# Altium PCB SH-C31G-V1.0.PcbDoc
Units mil, origin at the board's own origin, x right, y up, seen from the top; angles counter-clockwise.
Board outline 2106.3 x 1417.32 mil, 2 copper layers (Top Layer, Bottom Layer), stack 62.206 mil thick; 45 components, 30 nets, 166 pads, 49 vias.
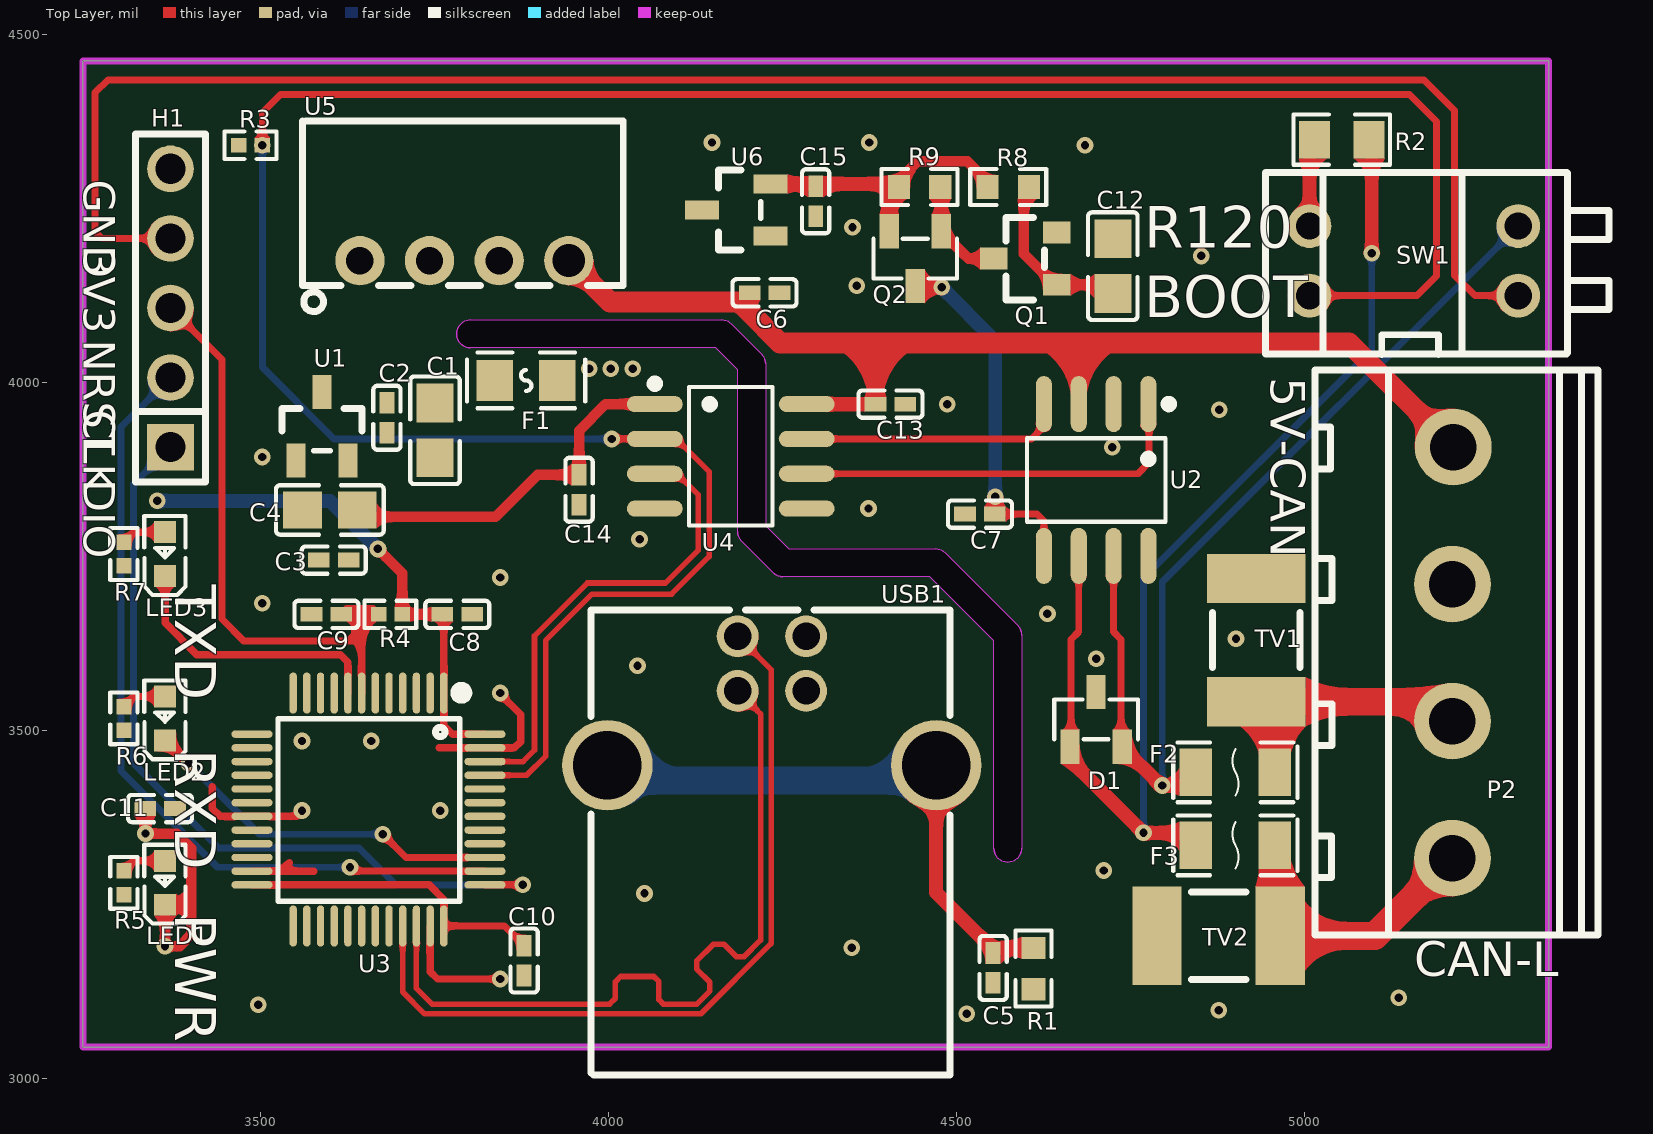
[diagram p0: Top Layer view]
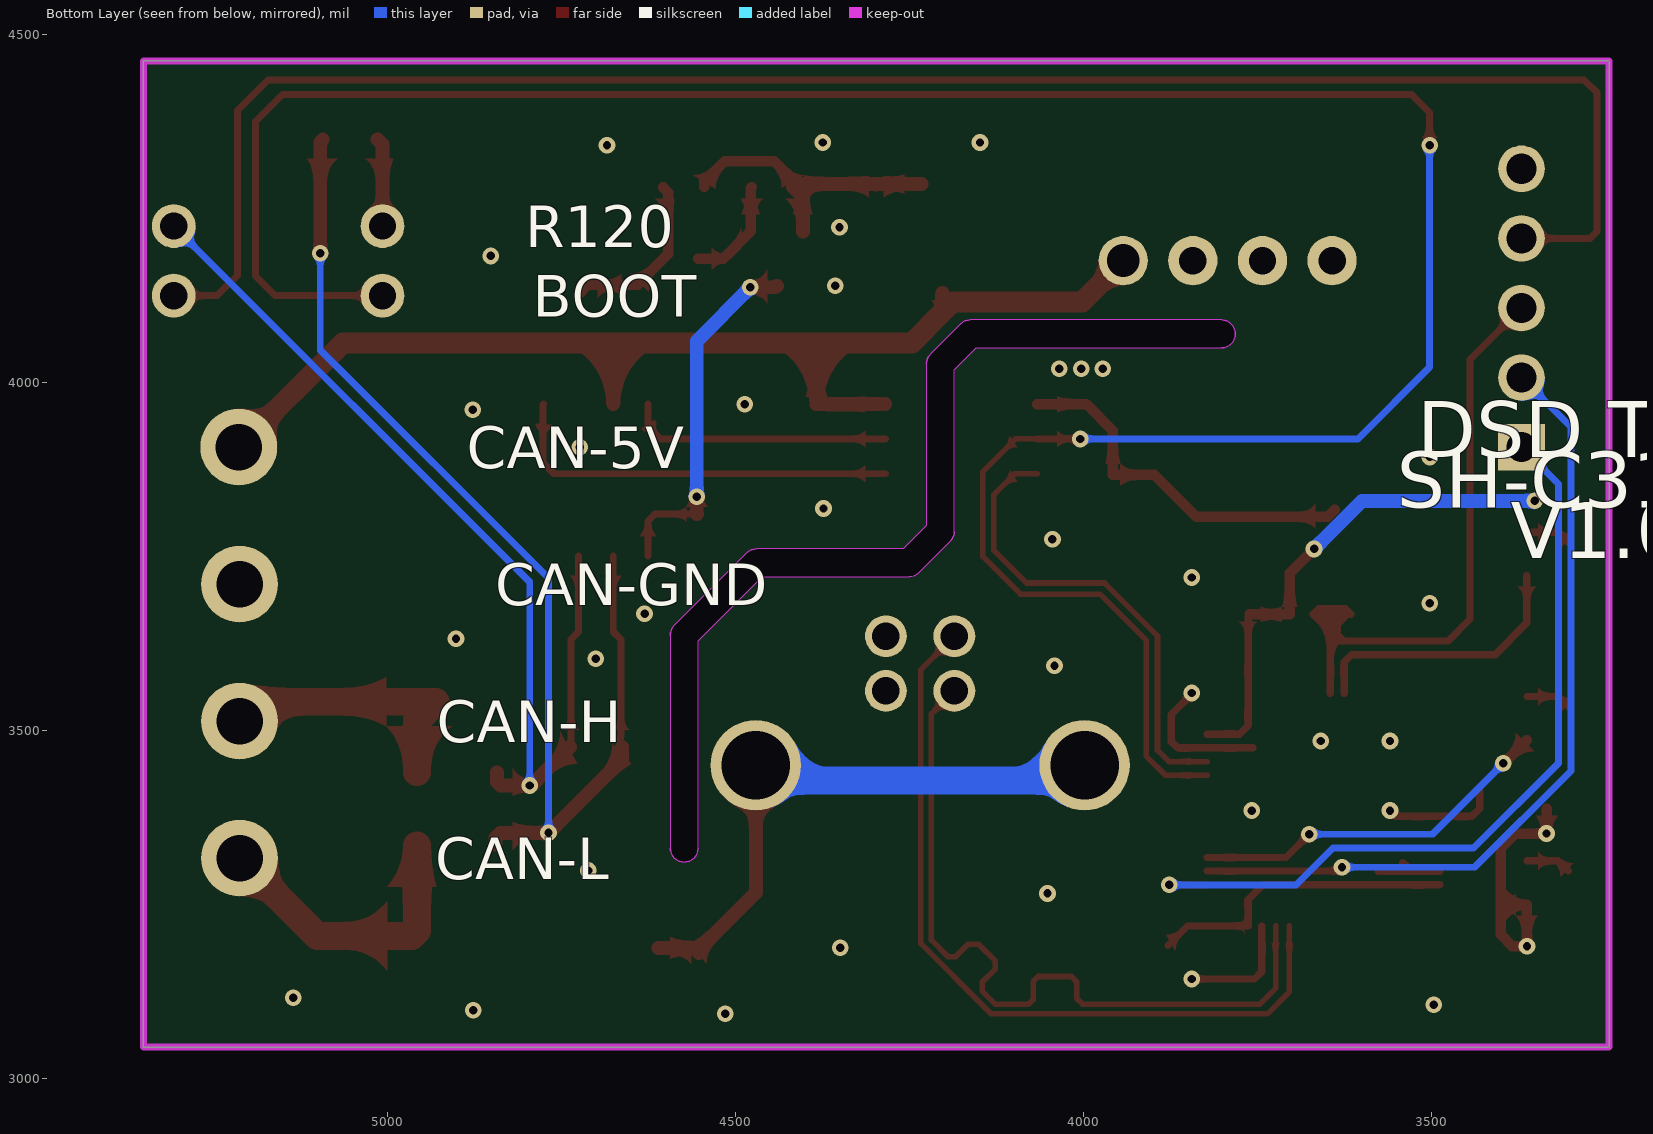
[diagram p1: Bottom Layer view, seen from below]

## Layer stack, top to bottom
Top Solder Mask Layer: solder mask 0.394, Dk 3.3
Top Layer: signal copper 1.379
Dielectric1: surface 59.449, FR4, Dk 4.5
Bottom Layer: signal copper 1.378
Bottom Solder Mask Layer: solder mask 0.394, Dk 3.3

## Board outline
3244.5,3044.65 3244.5,4461.97 5350.79,4461.97 5350.79,3044.65
cut-out: 4573.5,3310.65 4569.59,3311.03 4565.84,3312.17 4562.38,3314.02 4559.35,3316.51 4556.87,3319.54 4555.02,3322.99 4553.88,3326.75 4553.5,3330.65 4553.5,3628.36 4461.21,3720.65 4250.5,3720.65 4246.59,3721.03 4242.84,3722.17 4239.38,3724.02 4236.35,3726.51 4191.35,3771.51 4188.87,3774.54 4187.02,3777.99 4185.88,3781.75 4185.5,3785.65 4185.5,4018.36 4154.21,4049.65 3801.5,4049.65 3797.59,4050.03 3793.84,4051.17 3790.38,4053.02 3787.35,4055.51 3784.87,4058.54 3783.02,4061.99 3781.88,4065.75 3781.5,4069.65 3781.88,4073.55 3783.02,4077.3 3784.87,4080.76 3787.35,4083.79 3790.38,4086.28 3793.84,4088.12 3797.59,4089.26 3801.5,4089.65 4162.5,4089.65 4166.4,4089.26 4170.15,4088.12 4173.61,4086.28 4176.64,4083.79 4219.64,4040.79 4222.13,4037.76 4223.97,4034.3 4225.11,4030.55 4225.5,4026.65 4225.5,3793.93 4258.78,3760.65 4469.5,3760.65 4473.4,3760.26 4477.15,3759.12 4480.61,3757.28 4483.64,3754.79 4587.64,3650.79 4590.13,3647.76 4591.97,3644.3 4593.11,3640.55 4593.5,3636.65 4593.5,3330.65 4593.11,3326.75 4591.97,3322.99 4590.13,3319.54 4587.64,3316.51 4584.61,3314.02 4581.15,3312.17 4577.4,3311.03

## Design rules (kind name [scope] priority, off if disabled: settings)
BoardOutlineClearance Default [All] p0: genericclearance=10 ignorepadtopadclearanceinfootprint=FALSE except(0: Arc-SplitContinuation Track-SplitContinuation SMDPad-SplitContinuation THPad-SplitContinuation Via-SplitContinuation Fill-SplitContinuation Poly-SplitContinuation Region-SplitContinuation Text-SplitContinuation)
BoardOutlineClearance Plane_Default [All] p0: genericclearance=10 ignorepadtopadclearanceinfootprint=FALSE except(0: Arc-SplitContinuation Track-SplitContinuation SMDPad-SplitContinuation THPad-SplitContinuation Via-SplitContinuation Fill-SplitContinuation Poly-SplitContinuation Region-SplitContinuation Text-SplitContinuation)
BoardOutlineClearance Copper_gge5476 [All] p0: genericclearance=10 ignorepadtopadclearanceinfootprint=FALSE except(0: Arc-SplitContinuation Track-SplitContinuation SMDPad-SplitContinuation THPad-SplitContinuation Via-SplitContinuation Fill-SplitContinuation Poly-SplitContinuation Region-SplitContinuation Text-SplitContinuation)
BoardOutlineClearance Copper_gge6378 [All] p0: genericclearance=10 ignorepadtopadclearanceinfootprint=FALSE except(0: Arc-SplitContinuation Track-SplitContinuation SMDPad-SplitContinuation THPad-SplitContinuation Via-SplitContinuation Fill-SplitContinuation Poly-SplitContinuation Region-SplitContinuation Text-SplitContinuation)
BoardOutlineClearance Copper_gge5478 [All] p0: genericclearance=10 ignorepadtopadclearanceinfootprint=FALSE except(0: Arc-SplitContinuation Track-SplitContinuation SMDPad-SplitContinuation THPad-SplitContinuation Via-SplitContinuation Fill-SplitContinuation Poly-SplitContinuation Region-SplitContinuation Text-SplitContinuation)
BoardOutlineClearance Copper_gge6371 [All] p0: genericclearance=10 ignorepadtopadclearanceinfootprint=FALSE except(0: Arc-SplitContinuation Track-SplitContinuation SMDPad-SplitContinuation THPad-SplitContinuation Via-SplitContinuation Fill-SplitContinuation Poly-SplitContinuation Region-SplitContinuation Text-SplitContinuation)
BoardOutlineClearance otherClearance [All] p0: genericclearance=10 ignorepadtopadclearanceinfootprint=FALSE except(0: Arc-SplitContinuation Track-SplitContinuation SMDPad-SplitContinuation THPad-SplitContinuation Via-SplitContinuation Fill-SplitContinuation Poly-SplitContinuation Region-SplitContinuation Text-SplitContinuation)
Clearance Default [All] p1: gap=7 ignorepadtopadclearanceinfootprint=FALSE
Clearance Plane_Default [All] p1: gap=7 ignorepadtopadclearanceinfootprint=FALSE
Clearance Copper_gge5476 [All] p1: gap=7 ignorepadtopadclearanceinfootprint=FALSE
Clearance Copper_gge6378 [All] p1: gap=7 ignorepadtopadclearanceinfootprint=FALSE
Clearance Copper_gge5478 [All] p1: gap=7 ignorepadtopadclearanceinfootprint=FALSE
Clearance Copper_gge6371 [All] p1: gap=7 ignorepadtopadclearanceinfootprint=FALSE
Clearance otherClearance [All] p1: gap=7 ignorepadtopadclearanceinfootprint=FALSE
DiffPairsRouting differentialPair [All] p1: maxuncoupledlength=10 minlimit=5.9843 maxlimit=Infinity mostfreqgap=5.9843 toplayer_minwidth=5 toplayer_prefwidth=10 toplayer_maxwidth=100 bottomlayer_minwidth=5 bottomlayer_prefwidth=10 bottomlayer_maxwidth=100
PasteMaskExpansion pasteMaskExpansion [All] p1: expansion=0
PlaneConnect Default [All] p1: planeconnectstyle=Relief reliefexpansion=20 reliefentries=4 reliefconductorwidth=0 reliefairgap=10
PolygonConnect gge5476 [All] p1: connectstyle=Direct reliefentries=4 reliefconductorwidth=10 polygonreliefangle="90 Angle" airgapwidth=10
PolygonConnect gge6378 [All] p1: connectstyle=Direct reliefentries=4 reliefconductorwidth=10 polygonreliefangle="90 Angle" airgapwidth=10
PolygonConnect gge5478 [All] p1: connectstyle=Relief reliefentries=4 reliefconductorwidth=0 polygonreliefangle="90 Angle" airgapwidth=10
PolygonConnect gge6371 [All] p1: connectstyle=Direct reliefentries=4 reliefconductorwidth=10 polygonreliefangle="90 Angle" airgapwidth=10
RoutingVias Default [All] p1: viastyle="Through Hole" holewidth=12.0078 minholewidth=12.0078 maxholewidth=2362.0078 width=12.0078 minwidth=12.0078 maxwidth=2362.0078
SolderMaskExpansion solderMaskExpansion [IsVia] p1: useseparateexpansions=TRUE expansion=-1000 expansionbottom=-1000
SolderMaskExpansion solderMaskExpansion [All] p2: useseparateexpansions=TRUE expansion=4.0158 expansionbottom=4.0158
Width Default [All] p1: maxlimit=1000 minlimit=8 preferedwidth=10

## Components (designator, comment, footprint, x,y, rotation, side; value= is the part's Value field where it differs from the comment)
C1 "10uF" C0805_1 3750.5,3931.02 r90 top locked
C2 "100nF" C0402_2 3681.5,3949.11 r90 top locked
C3 "100nF" C0402_2 3604.96,3744.65 r0 top locked
C4 "10uF" C0805_1 3599.5,3816.65 r0 top locked
C5 "100nF" C0402_2 4552.5,3158.65 r90 top
C6 "100nF" C0402_2 4224.04,4128.65 r180 top
C7 "NC" C0402_2 4533.5,3810.65 r0 top
C8 "100nF" C0402_2 3782.5,3666.65 r180 top locked
C9 "100nF" C0402_2 3594.5,3666.65 r0 top locked
C10 "100nF" C0402_2 3878.5,3169.19 r90 top
C11 "100nF" C0402_2 3355.5,3387.65 r0 top
C12 "10uF" C0805_1 4724.5,4167.02 r270 top locked
C13 "" C0402 4404.96,3968.65 r180 top locked
C14 "" C0402 3957.5,3845.65 r90 top
C15 "100nF" C0402_2 4297.5,4260.11 r90 top locked
D1 "" SOT-23-3_L2.9-W1.3-P1.90-LS2.4-BR 4700.5,3515.65 r270 top locked
F1 "" F0805 3881.5,4002.65 r180 top locked
F2 "SMD1206B020TF/24" F1206_1 4900.5,3439.65 r0 top locked
F3 "SMD1206B020TF/24" F1206_1 4900.5,3334.65 r0 top locked
H1 "" HDR-TH_5P-P2.54-V-M 3370.48,4106.85 r90 top locked
LED1 "" LED0603-RD_RED_1 3362.61,3280.87 r90 top locked
LED2 "" LED0603-RD 3362.61,3517.09 r90 top locked
LED3 "" LED0603-RD 3362.61,3753.31 r90 top locked
P2 "WJ128V-5.0-4P" CONN-TH_4P-P5.00_WJ128V-4P-5.0-14-00A 5213,3611.58 r90 top locked
Q1 "S8050" SOT-23_L2.9-W1.3-P1.90-LS2.4-BR 4598.77,4177.65 r0 top locked
Q2 "SI2301" SOT-23-3_L2.9-W1.3-P1.90-LS2.4-BR_2 4440.5,4177.65 r90 top locked
R1 "" R0603 4610.5,3157.65 r90 top
R2 "" R0805 5053.5,4348.65 r180 top locked
R3 "" R0402 3485.46,4340.65 r0 top
R4 "" R0402 3686.5,3666.65 r0 top locked
R5 "" R0402 3303.55,3280.87 r90 top locked
R6 "" R0402 3303.55,3517.09 r90 top locked
R7 "" R0402 3303.55,3753.31 r90 top locked
R8 "" R0603 4574.16,4280.65 r180 top locked
R9 "100kΩ" R0603 4446.84,4280.65 r180 top locked
SW1 "DP-02RP" SW-TH_DP-02XP 5157.05,4174.57 r90 top locked
TV1 "" DIO-DT-SMD_L4.5-W3.2 4930.5,3629.65 r90 top locked
TV2 "" DIO-DT-SMD_L4.5-W3.2 4876.5,3204.65 r180 top locked
U1 "ME6209A33M3G" SOT-23(SOT-23-3) 3588.1,3936.85 r0 top locked
U2 "TJA1051T/3,118" SOIC-8_L4.9-W3.9-P1.27-LS6.0-BL 4700.5,3859.65 r180 top locked
U3 "STM32G431C8T6TR" LQFP-48_L7.0-W7.0-P0.50-LS9.0-BL_1 3654.95,3386.2 r180 top locked
U4 "ADUM3201ARZ" SOIC-8_L4.9-W3.9-P1.27-LS6.0-BL 4175.5,3893.65 r270 top locked
U5 "B0505S-1WR3" PWRM-TH_B0503S-1WR2 3792.68,4174.84 r0 top locked
U6 "ME6209A33M3G" SOT-23(SOT-23-3) 4183.5,4247.65 r90 top locked
USB1 "" USB-B-TH_USB-B01 4234.5,3542.6 r180 top locked

## Footprints (in the part's own frame and the unit in brackets; to place one, negate y for a bottom-side part, rotate by r counter-clockwise, add the part's x,y. Pads: shape width x height; smd on the part's side, far side on the other; paste and mask are expansions set on the pad)
C0402 [mm]
  rect 0.79x0.54 smd paste-100 mask+0.051: 1(-0.545,0) 2(0.545,0)
  silkscreen extent -1.17,-0.5 1.17,0.5
C0402_2 [mm]
  rect 0.79x0.54 smd paste-100 mask+0.051: 1(-0.545,0) 2(0.545,0)
  silkscreen extent -1.17,-0.5 1.17,0.5
C0805_1 [mm]
  rect 1.41x1.35 smd paste-100 mask+0.051: 1(-1,0) 2(1,0)
  silkscreen extent -1.96,-0.9 1.96,0.9
CONN-TH_4P-P5.00_WJ128V-4P-5.0-14-00A [mm]
  round 2.8 hole 1.7 paste+0 mask+0.051: 1(-7.5,0.015) 2(-2.5,0.015) 3(2.5,0.015) 4(7.5,-0.015)
  silkscreen extent -10.31,-5.29 10.31,5.02
DIO-DT-SMD_L4.5-W3.2 [mm]
  rect 1.8x3.6 smd paste+0 mask+0.051: 1(-2.25,0) 2(2.25,0)
  silkscreen extent -1,-1.6 1,1.6
F0805 [mm]
  rect 1.335x1.5 smd paste-100 mask+0.051: 1(-1.142,0) 2(1.142,0)
  silkscreen extent -2.16,-1.02 2.16,1.02
F1206_1 [mm]
  rect 1.19x1.728 smd paste+0 mask+0.051: 1(-1.445,0) 2(1.445,0)
  silkscreen extent -2.27,-1.09 2.27,1.09
HDR-TH_5P-P2.54-V-M [mm]
  rect 1.7x1.7 hole 1.1 paste+0 mask+0.051: 1(-5.08,0)
  round 1.7 hole 1.1 paste+0 mask+0.051: 2(-2.54,0) 3(0,0) 4(2.54,0) 5(5.08,0)
  silkscreen extent -6.35,-1.27 6.35,1.27
LED0603-RD [mm]
  rect 0.8x0.8 smd paste+0 mask+0.051: 1(-0.799,-0.003) 2(0.799,0.003)
  silkscreen extent -1.49,-0.75 1.39,0.76
LED0603-RD_RED_1 [mm]
  rect 0.8x0.8 smd paste+0 mask+0.051: 1(-0.8,-0.003) 2(0.8,0.003)
  silkscreen extent -1.49,-0.75 1.39,0.76
LQFP-48_L7.0-W7.0-P0.50-LS9.0-BL_1 [mm]
  oval 0.27x1.5 smd paste+0 mask+0.05: 1(-2.75,-4.25) 2(-2.25,-4.25) 3(-1.75,-4.25) 4(-1.25,-4.25) 5(-0.75,-4.25) 6(-0.25,-4.25) 7(0.25,-4.25) 8(0.75,-4.25) 9(1.25,-4.25) 10(1.75,-4.25) 11(2.25,-4.25) 12(2.75,-4.25) 25(2.75,4.25) 26(2.25,4.25) 27(1.75,4.25) 28(1.25,4.25) 29(0.75,4.25) 30(0.25,4.25) 31(-0.25,4.25) 32(-0.75,4.25) 33(-1.25,4.25) 34(-1.75,4.25) 35(-2.25,4.25) 36(-2.75,4.25)
  oval 1.5x0.27 smd paste+0 mask+0.05: 13(4.25,-2.75) 14(4.25,-2.25) 15(4.25,-1.75) 16(4.25,-1.25) 17(4.25,-0.75) 18(4.25,-0.25) 19(4.25,0.25) 20(4.25,0.75) 21(4.25,1.25) 22(4.25,1.75) 23(4.25,2.25) 24(4.25,2.75) 37(-4.25,2.75) 38(-4.25,2.25) 39(-4.25,1.75) 40(-4.25,1.25) 41(-4.25,0.75) 42(-4.25,0.25) 43(-4.25,-0.25) 44(-4.25,-0.75) 45(-4.25,-1.25) 46(-4.25,-1.75) 47(-4.25,-2.25) 48(-4.25,-2.75)
  silkscreen extent -3.59,-4.46 3.3,3.34
PWRM-TH_B0503S-1WR2 [mm]
  round 1.8 hole 1 paste+0 mask+0.051: 1(-3.81,0) 2(-1.27,0) 3(1.27,0)
  round 1.8 hole 1.2 paste+0 mask+0.051: 4(3.81,0)
  silkscreen extent -5.9,-1.86 5.8,5.1
R0402 [mm]
  rect 0.566x0.54 smd paste-100 mask+0.051: 1(-0.433,0) 2(0.433,0)
  silkscreen extent -0.94,-0.5 0.94,0.5
R0603 [mil]
  rect 31.75x34.02 smd paste-3937.01 mask+2: 1(-29.66,0) 2(29.66,0)
  silkscreen extent -55,-26 55,26
R0805 [mm]
  rect 1.133x1.377 smd paste-100 mask+0.051: 1(-1,0) 2(1,0)
  silkscreen extent -1.76,-0.92 1.76,0.92
SOIC-8_L4.9-W3.9-P1.27-LS6.0-BL [mm]
  oval 0.588x2.045 smd paste+0 mask+0.051: 1(-1.905,-2.772) 2(-0.635,-2.772) 3(0.635,-2.772) 4(1.905,-2.772) 5(1.905,2.772) 6(0.635,2.772) 7(-0.635,2.772) 8(-1.905,2.772)
  silkscreen extent -2.8,-2.92 2.53,1.52
SOT-23(SOT-23-3) [mm]
  rect 0.7x1.25 smd paste+0 mask+0.102: 1(-0.95,-1.25) 2(0.95,-1.25) 3(0,1.25)
  silkscreen extent -1.46,-0.9 1.46,0.65
SOT-23-3_L2.9-W1.3-P1.90-LS2.4-BR [mm]
  rect 1.25x0.7 smd paste+0 mask+0.051: 1(1,-0.95) 2(1,0.95) 3(-1,0)
  silkscreen extent -0.73,-1.53 0.73,1.53
SOT-23-3_L2.9-W1.3-P1.90-LS2.4-BR_2 [mm]
  rect 1.25x0.7 smd paste+0 mask+0.051: 1(1,-0.95) 2(1,0.95) 3(-1,0)
  silkscreen extent -0.73,-1.53 0.73,1.53
SOT-23_L2.9-W1.3-P1.90-LS2.4-BR [mm]
  rect 1x0.8 smd paste+0 mask+0.051: 1(1.15,-0.95) 2(1.15,0.95) 3(-1.15,0)
  silkscreen extent -0.7,-1.5 0.7,1.5
SW-TH_DP-02XP [mm]
  round 1.6 hole 1 paste+0 mask+0.051: 1(-1.27,-3.81) 2(1.27,-3.81) 3(1.27,3.81) 4(-1.27,3.81)
  silkscreen extent -3.42,-7.13 3.22,5.42
USB-B-TH_USB-B01 [mil]
  round 60 hole 39.4 paste+0 mask+2: 1(-49.2,-92.7) 2(49.2,-92.7) 3(49.2,-14) 4(-49.2,-14)
  round 129.9 hole 98.4 paste+0 mask+2: 5(-236.2,92.7) 6(236.2,92.7)
  silkscreen extent -256,-130 260,538

## Via types
v1: diameter 24, hole 12, Top Layer to Bottom Layer, 49 vias

## Nets (pads, with @x,y where several pads share a name; then routed paths per layer and width w, separated by ;. In a path a pad name is that pad's centre, name@x,y a point inside that pad or via, vN(x,y) a via of type N, cw(c..) or ccw(c..) an arc to the next point about the centre after c; other vN are vias at no path point)
$C5_2: C5.2 R1.2 USB1.5 USB1.6 | length 865
  Top Layer w20: USB1.5 4470.7,3266.83 C5.2@4550.22,3187.31 ; R1.2 C5.2@4559.7,3187.31 ; C5.2@4550.22,3187.31 C5.2@4559.7,3187.31 ; C5.2@4550.22,3187.31 4552.5,3185.03 C5.2 C5.2@4559.7,3187.31
  Bottom Layer w40: USB1.6 4020.55,3427.65 4448.44,3427.65 USB1.5
$C12_2: C12.2 Q1.1 R8.1 | length 247.2
  Top Layer w15: R8.1 4603.82,4279.65 4596.5,4272.33 4596.5,4184.86 4640.11,4141.24 Q1.1@4640.11,4140.24 ; Q1.1 4711.9,4140.24 C12.2
$C15_2: C15.2 Q2.2 R8.2 R9.2 U6.2 | length 444.6
  Top Layer w15: C15.2 C15.2@4297.5,4285.04 ; R9.2 4417.18,4290.33 4444.5,4317.65 4515.5,4317.65 4544.5,4288.65 R8.2
  Top Layer w20: U6.2 4297.5,4285.04 4412.78,4285.04 R9.2 R9.2@4403.1,4266.57 ; 4393.5,4279.65 4403.1,4270.05 R9.2@4403.1,4266.57 ; Q2.2 R9.2@4403.1,4266.57
$F2_2: F2.2 P2.2 TV1.1 | length 406
  Top Layer w40: F2.2 4957.39,3514.18 TV1.1 5184.49,3541.07 P2.2
$F3_2: F3.2 P2.1 TV2.1 | length 426.8
  Top Layer w40: F3.2 4957.39,3212.34 TV2.1 5100.76,3204.65 P2.1
$LED1_2: LED1.2 R5.2 | length 64.9
  Top Layer w10.6: R5.2 3317.99,3312.34 LED1.2
$LED2_2: LED2.2 R6.2 | length 64.9
  Top Layer w10.6: R6.2 3317.99,3548.56 LED2.2
$LED3_2: LED3.2 R7.2 | length 64.9
  Top Layer w10.6: R7.2 3317.99,3784.78 LED3.2
$Q1_3: Q1.3 Q2.1 R9.1 | length 156.1
  Top Layer w15: R9.1 4477.9,4279.25 Q2.1 4517.27,4177.65 Q1.3
$R2_2: R2.2 SW1.3 | length 144
  Top Layer w20: R2.2 5007.05,4341.58 SW1.3 SW1.3@5019.05,4236.57
+3V3: C3.2 C4.2 C8.2 C10.2 C11.2 C14.2 H1.4 R4.2 R5.1 R6.1 R7.1 SW1.1 U1.2 U3.1 U3.20 U3.21 U3.24 U3.36 U3.48 U4.1 | length 4353.2
  Top Layer w10: H1.4 3272.29,4206.85 3262.29,4216.85 3262.29,4416.44 3280.5,4434.65 5171.5,4434.65 5215.5,4390.65 5215.5,4153.65 5244.57,4124.57 SW1.1 ; U3.36 3850.26,3218.88 C10.2
  Top Layer w10.6: U3.24 3742.21,3277.93 3763.22,3256.92 U3.36 ; C8.2 3763.22,3664.46 U3.1 3763.22,3506.92 3775.67,3494.47 U3.48
  Top Layer w15: C4.2 3648.87,3806.65 3837.5,3806.65 3897.96,3867.11 C14.2 3957.5,3930.65 3995.5,3968.65 U4.1 ; v1(3668.5,3760.65) 3703.54,3725.61 R4.2 C8.2
  Bottom Layer w20: v1(3351.5,3829.65) 3599.5,3829.65 v1(3668.5,3760.65)
+3V3A: C7.2 Q2.3 U2.5 | length 521.6
  Top Layer w10: C7.2 4615.5,3810.65 4625.5,3800.65 U2.5
  Top Layer w20: Q2.3 4442.13,4136.65 v1(4478.5,4136.65) ; C7.2 4555.5,3811.19 v1(4555.5,3835.65)
  Bottom Layer w20: v1(4478.5,4136.65) 4555.5,4059.65 v1(4555.5,3835.65)
+5V: C1.2 C2.2 F1.2 U1.3 U5.2
CAN_H: D1.2 F2.1 SW1.2 U2.7 | length 1438.6
  Top Layer w10: U2.7 4725.5,3641.65 4736.5,3630.65 4736.5,3491.02 4735.9,3490.42 D1.2@4735.9,3476.28
  Top Layer w20: D1.2 4793.53,3420.65 v1(4795.5,3420.65) 4837.5,3420.65 4842.61,3425.76 F2.1@4842.61,3439.65
  Bottom Layer w10: v1(4795.5,3420.65) 4795.5,3713.01 SW1.2
CAN_L: D1.1 F3.1 R2.1 U2.6 | length 1668.6
  Top Layer w10: D1.1@4665.1,3476.28 4665.1,3490.42 4664.5,3491.02 4664.5,3630.65 4675.5,3641.65 U2.6
  Top Layer w20: D1.1 4663.1,3458.05 v1(4768.5,3352.65) 4837.5,3352.65 4844.5,3345.65 F3.1@4844.5,3335.65 ; R2.1 5096.5,4345.02 v1(5096.5,4185.65)
  Bottom Layer w10: v1(4768.5,3352.65) 4768.5,3718.65 5096.5,4046.65 v1(5096.5,4185.65)
CAN_RXD: U2.4 U4.7 | length 380.5
  Top Layer w10: U4.7 4607.5,3918.65 4625.5,3936.65 U2.4
CAN_TXD: U2.1 U4.6 | length 583
  Top Layer w10: U4.6 4760.5,3868.65 4776.5,3884.65 4776.5,3967.8 U2.1
GND: C1.1 C2.1 C3.1 C4.1 C5.1 C8.1 C9.1 C10.1 C11.1 C14.1 H1.5 LED1.1 R1.1 R3.1 U1.1 U3.19 U3.23 U3.35 U3.47 U4.4 U5.1 USB1.4 | length 1025.4
  Top Layer w10: 3823.5,3142.65 v1(3844.5,3142.65)
  Top Layer w10.6: 3430.5,3418.65 3430.5,3387.65 3441.78,3376.36 U3.19 3551.21,3376.36 v1(3559.5,3384.65) ; U3.23 3529.47,3297.62 ; 3541.5,3309.65 3529.47,3297.62 ; 3576.47,3297.62 3529.47,3297.62 ; U3.35 3743.53,3153.25 3754.13,3142.65 3823.5,3142.65 ; 3756.63,3474.78 U3.47 3864.63,3474.78 3873.5,3483.65 3873.5,3522.65 3844.5,3551.65 v1(3844.5,3553.65)
  Top Layer w15: C11.1 3334.5,3387.19 v1(3334.5,3351.65) 3379.5,3351.65 3400.5,3330.65 3400.5,3250.17 ; 3400.5,3250.17 3399.71,3249.38 LED1.1 3362.74,3189.89 v1(3362.5,3189.65) 3383.5,3189.65 3400.5,3206.65 3400.5,3250.17
  other v1: 4514.5,3092.65 3496.5,3105.65 4349.5,3187.65 4051.5,3265.65 3758.16,3384.65 3559.5,3484.65 3658.83,3484.65 4041.5,3592.65 3502.5,3682.65 3844.5,3719.65 4044.5,3774.65 3502.5,3892.65
GND-CAN: C6.1 C7.1 C12.1 C13.1 C15.1 D1.3 P2.3 Q1.2 TV1.2 TV2.2 U2.2 U2.8 U4.5 U5.3 U6.1
  other v1: 4876.5,3097.98 5135.5,3115.65 4711.5,3298.65 4700.5,3602.65 4901.5,3631.65 4630.5,3667.65 4373.5,3818.65 4723.5,3906.65 4877.5,3960.65 4486.5,3968.65 4356.5,4138.65 4851.5,4181.65 4350.5,4222.65 4684.5,4340.65 4148.5,4344.65 4374.5,4344.65
JL-SWCLK: H1.2 U3.38 | length 1177
  Top Layer w10: v1(3628.5,3303.22) 3634.1,3297.62 U3.38
  Bottom Layer w10: H1.2 3299.5,3935.87 3299.5,3441.65 3437.92,3303.22 v1(3628.5,3303.22)
JL-SWDIO: H1.1 U3.37 | length 1161.7
  Top Layer w10: U3.37 v1(3876.5,3277.95)
  Bottom Layer w10: H1.1 3317.49,3853.86 3317.49,3452.66 3439.5,3330.65 3641.5,3330.65 3694.2,3277.95 v1(3876.5,3277.95)
LED1: LED2.1 U3.39 | length 529.2
  Top Layer w10.6: v1(3675.5,3350.65) 3708.84,3317.3 U3.39
  Top Layer w15: LED2.1 3395.71,3452.65 v1(3396.5,3452.65)
  Bottom Layer w10: v1(3396.5,3452.65) 3498.5,3350.65 v1(3675.5,3350.65)
LED2: LED3.1 U3.8 | length 398
  Top Layer w10.6: LED3.1 3362.74,3654.4 3408.42,3608.72 3614.82,3608.72 3625.42,3598.12 U3.8
NRST: C9.2 H1.3 R4.1 U3.7 | length 1084.3
  Top Layer w10: H1.3 3444.5,4032.84 3444.5,3659.65 3475.5,3628.65 3626.51,3628.65 ; 3638.05,3666.65 3635.19,3663.79 3635.19,3658.35 3635.19,3654.69 3635.19,3652.72 3635.19,3637.33 ; 3645.11,3618.73 3635.19,3628.65 ; 3626.51,3628.65 3635.19,3637.33 ; 3626.51,3628.65 3635.19,3628.65 ; 3635.19,3628.65 3635.19,3637.33
  Top Layer w10.6: U3.7 3645.11,3618.73 3645.11,3642.81 ; C9.2@3621.27,3666.65 C9.2 3623.96,3674.65 3661.46,3674.65 R4.1 ; C9.2@3621.27,3666.65 C9.2@3629.57,3658.35 ; C9.2@3621.27,3666.65 3638.05,3666.65 R4.1@3668.95,3666.65 ; C9.2@3629.57,3658.35 3633.23,3654.69 ; C9.2@3629.57,3658.35 3635.19,3658.35 R4.1@3660.65,3658.35 ; 3633.23,3654.69 3635.19,3654.69 3656.99,3654.69 ; 3633.23,3654.69 3635.19,3652.72 3645.11,3642.81 ; 3645.11,3642.81 3656.99,3654.69 ; 3656.99,3654.69 R4.1@3660.65,3658.35 ; R4.1@3660.65,3658.35 R4.1@3668.95,3666.65 ; R4.1@3660.65,3658.35 3661.16,3658.35 R4.1 ; R4.1@3668.95,3666.65 R4.1
RXD: R3.2 SW1.4 U3.45 U4.2 | length 3872
  Top Layer w8: U3.45 3882.26,3435.41 3909.49,3462.64 3909.49,3629.02 3976.12,3695.66 4090.5,3695.66 4144.5,3749.65 4144.5,3871.65 4097.5,3918.65 U4.2
  Top Layer w10: v1(3502.5,4340.65) 3502.5,4387.65 3528.5,4413.65 5150.5,4413.65 5189.5,4374.65 5189.5,4152.65 5161.42,4124.57 SW1.4 ; v1(4004.5,3918.65) U4.2
  Bottom Layer w10: v1(3502.5,4340.65) 3502.5,4021.65 3605.5,3918.65 v1(4004.5,3918.65)
TXD: U3.46 U4.3 | length 682.6
  Top Layer w8: U3.46 3876.95,3455.1 3893.5,3471.65 3893.5,3635.65 3969.5,3711.65 4081.5,3711.65 4128.5,3758.65 4128.5,3838.65 4098.5,3868.65 U4.3
USBDM: U3.33 USB1.2 | length 1140.7
  Top Layer w8: U3.33 3704.16,3123.98 3735.59,3092.55 4132.4,3092.55 4233.5,3193.65 4233.5,3587.1 USB1.2
USBDP: U3.34 USB1.3 | length 1132.8
  Top Layer w8: U3.34 3723.85,3129.29 3746.5,3106.65 4001.5,3106.65 4009.5,3114.65 4009.5,3138.65 4017.15,3146.3 4064.84,3146.3 4072.15,3138.99 4072.15,3112.99 4078.5,3106.65 4126.72,3106.65 4145.5,3125.42 4145.5,3138 4126.5,3157 4126.5,3168.65 4150.5,3192.65 4165.5,3192.65 4183.45,3174.69 4194.76,3174.69 4218.5,3198.42 4218.5,3523.4 USB1.3
VBUS: F1.1 USB1.1
  other v1: 3972,4019.65 4003.25,4019.65 4034.5,4019.65
VDD-CAN: C6.2 C13.2 P2.4 U2.3 U4.8 U5.4 U6.3 | length 1685.7
  Top Layer w20: 4200.85,4102.29 4202.58,4104.01 C6.2 ; U4.8 C13.2 4383.5,4052.99 4387.15,4056.65 ; U2.3 4675.5,4055.53 4676.61,4056.65
  Top Layer w30: U5.4 4001.87,4115.65 4187.5,4115.65 4200.85,4102.29 4246.5,4056.65 4387.15,4056.65 4676.61,4056.65 5063.79,4056.65 P2.4
pads on no net: U3.2 U3.3 U3.4 U3.5 U3.6 U3.9 U3.10 U3.11 U3.12 U3.13 U3.14 U3.15 U3.16 U3.17 U3.18 U3.22 U3.25 U3.26 U3.27 U3.28 U3.29 U3.30 U3.31 U3.32 U3.40 U3.41 U3.42 U3.43 U3.44

## Polygon pours and split planes (outlines as drawn)
+5V on Top Layer (solid, remove dead copper, pour order 4): 3712.5,4224.65 3772.5,4224.65 3781.5,4215.65 3781.5,4105.65 3768.5,4092.65 3768.5,4047.65 3779.5,4036.65 3867.5,4036.65 3874.5,4029.65 3874.5,3967.65 3864.5,3957.65 3570.5,3957.65 3566.5,3961.65 3566.5,4030.65 3576.5,4040.65 3685.5,4040.65 3704.5,4059.65 3704.5,4216.65
VBUS on Top Layer (solid, remove dead copper, pour order 6): 3899.5,4036.65 4047.5,4036.65 4051.5,4032.65 4051.5,4004.65 4045.5,3998.65 3985.5,3998.65 3954.5,3967.65 3899.5,3967.65 3895.5,3971.65 3895.5,4032.65
VBUS on Bottom Layer (solid, remove dead copper, pour order 14): 3951.5,4048.65 4156.84,4048.65 4187.5,4017.99 4187.5,3789.12 4252.97,3723.65 4309.5,3723.65 4322.5,3710.65 4322.5,3616.65 4307.5,3601.65 4243.5,3601.65 4233.5,3611.65 4233.5,3649.65 4127.5,3755.65 4127.5,3972.65 4110.5,3989.65 3956.5,3989.65 3944.5,4001.65 3944.5,4041.65
GND on Bottom Layer (solid, remove dead copper, pour order 16): 3639.5,4462.65 3687.5,4414.65 3687.5,4089.65 3708.5,4068.65 4161.5,4068.65 4206.5,4023.65 4206.5,3784.65 4253.5,3737.65 4468.5,3737.65 4511.5,3694.65 4531.5,3694.65 4532.5,3695.65 4573.5,3654.65 4573.5,3046.65 4575.5,3044.65 3251.5,3044.65 3244.5,3051.65 3244.5,4462.65
GND on Top Layer (solid, remove dead copper, pour order 8): 3639.5,4462.65 3687.5,4414.65 3687.5,4089.65 3708.5,4068.65 4161.5,4068.65 4206.5,4023.65 4206.5,3784.65 4253.5,3737.65 4468.5,3737.65 4573.5,3632.65 4573.5,3158.99 4627.92,3120.91 4627.92,3044.65 3251.5,3044.65 3244.5,3051.65 3244.5,4462.65
VDD-CAN on Top Layer (solid, remove dead copper, pour order 10): 3924.5,4269.65 4162.5,4269.65 4171.5,4260.65 4171.5,4106.37 4165.5,4100.37 3910.77,4100.37 3903.5,4107.65 3903.5,4248.65
GND-CAN on Top Layer (solid, remove dead copper, pour order 12): 3804.5,4079.65 3804.5,4378.65 3832.5,4406.65 4930.5,4406.65 4957.22,4379.92 4957.22,4054.92 5351.5,3660.65 5351.5,3053.65 5341.5,3043.65 4682.5,3043.65 4653.5,3072.65 4653.5,3358.65 4573.5,3438.65 4573.5,3633.65 4471.5,3735.65 4268.5,3735.65 4216.5,3787.65 4207.5,3787.65 4207.5,4000.65 4200.5,4007.65 4200.5,4021.65 4152.5,4069.65 3814.5,4069.65
GND-CAN on Bottom Layer (solid, remove dead copper, pour order 18): 3804.5,4079.65 3804.5,4378.65 3832.5,4406.65 4930.5,4406.65 4957.22,4379.92 4957.22,4054.92 5351.5,3660.65 5351.5,3053.65 5341.5,3043.65 4682.5,3043.65 4653.5,3072.65 4653.5,3358.65 4573.5,3438.65 4573.5,3633.65 4471.5,3735.65 4268.5,3735.65 4216.5,3787.65 4207.5,3787.65 4207.5,4000.65 4200.5,4007.65 4200.5,4021.65 4152.5,4069.65 3814.5,4069.65
+3V3 on Top Layer (solid, remove dead copper, pour order 0): 3610.5,3862.65 3610.5,3740.65 3618.5,3732.65 3685.5,3732.65 3698.5,3745.65 3698.5,3844.65 3679.5,3863.65 3643.5,3863.65 3635.5,3871.65 3619.5,3871.65
+3V3 on Top Layer (solid, remove dead copper, pour order 2): 3397.5,4243.65 3409.5,4231.65 3409.5,4174.65 3399.5,4164.65 3328.5,4164.65 3310.5,4146.65 3310.5,3859.65 3320.5,3849.65 3373.5,3849.65 3379.5,3843.65 3379.5,3814.65 3373.5,3808.65 3291.5,3808.65 3281.5,3798.65 3281.5,3758.65 3303.42,3736.72 3303.42,3463.72 3333.5,3433.65 3386.5,3433.65 3398.5,3421.65 3398.5,3376.65 3408.5,3366.65 3515.5,3366.65 3519.5,3362.65 3519.5,3277.65 3514.5,3272.65 3439.5,3272.65 3416.5,3295.65 3322.43,3295.65 3313.61,3286.83 3313.61,3239.76 3311.5,3237.65 3263.5,3237.65 3245.5,3255.65 3245.5,4232.65 3256.5,4243.65

## Keep-outs
Board Outline Layer:
  region: 4573.5,3310.65 4569.59,3311.03 4565.84,3312.17 4562.38,3314.02 4559.35,3316.51 4556.87,3319.54 4555.02,3322.99 4553.88,3326.75 4553.5,3330.65 4553.5,3628.36 4461.21,3720.65 4250.5,3720.65 4246.59,3721.03 4242.84,3722.17 4239.38,3724.02 4236.35,3726.51 4191.35,3771.51 4188.87,3774.54 4187.02,3777.99 4185.88,3781.75 4185.5,3785.65 4185.5,4018.36 4154.21,4049.65 3801.5,4049.65 3797.59,4050.03 3793.84,4051.17 3790.38,4053.02 3787.35,4055.51 3784.87,4058.54 3783.02,4061.99 3781.88,4065.75 3781.5,4069.65 3781.88,4073.55 3783.02,4077.3 3784.87,4080.76 3787.35,4083.79 3790.38,4086.28 3793.84,4088.12 3797.59,4089.26 3801.5,4089.65 4162.5,4089.65 4166.4,4089.26 4170.15,4088.12 4173.61,4086.28 4176.64,4083.79 4219.64,4040.79 4222.13,4037.76 4223.97,4034.3 4225.11,4030.55 4225.5,4026.65 4225.5,3793.93 4258.78,3760.65 4469.5,3760.65 4473.4,3760.26 4477.15,3759.12 4480.61,3757.28 4483.64,3754.79 4587.64,3650.79 4590.13,3647.76 4591.97,3644.3 4593.11,3640.55 4593.5,3636.65 4593.5,3330.65 4593.11,3326.75 4591.97,3322.99 4590.13,3319.54 4587.64,3316.51 4584.61,3314.02 4581.15,3312.17 4577.4,3311.03
  region: 4573.5,3310.65 4569.59,3311.03 4565.84,3312.17 4562.38,3314.02 4559.35,3316.51 4556.87,3319.54 4555.02,3322.99 4553.88,3326.75 4553.5,3330.65 4553.5,3628.36 4461.21,3720.65 4250.5,3720.65 4246.59,3721.03 4242.84,3722.17 4239.38,3724.02 4236.35,3726.51 4191.35,3771.51 4188.87,3774.54 4187.02,3777.99 4185.88,3781.75 4185.5,3785.65 4185.5,4018.36 4154.21,4049.65 3801.5,4049.65 3797.59,4050.03 3793.84,4051.17 3790.38,4053.02 3787.35,4055.51 3784.87,4058.54 3783.02,4061.99 3781.88,4065.75 3781.5,4069.65 3781.88,4073.55 3783.02,4077.3 3784.87,4080.76 3787.35,4083.79 3790.38,4086.28 3793.84,4088.12 3797.59,4089.26 3801.5,4089.65 4162.5,4089.65 4166.4,4089.26 4170.15,4088.12 4173.61,4086.28 4176.64,4083.79 4219.64,4040.79 4222.13,4037.76 4223.97,4034.3 4225.11,4030.55 4225.5,4026.65 4225.5,3793.93 4258.78,3760.65 4469.5,3760.65 4473.4,3760.26 4477.15,3759.12 4480.61,3757.28 4483.64,3754.79 4587.64,3650.79 4590.13,3647.76 4591.97,3644.3 4593.11,3640.55 4593.5,3636.65 4593.5,3330.65 4593.11,3326.75 4591.97,3322.99 4590.13,3319.54 4587.64,3316.51 4584.61,3314.02 4581.15,3312.17 4577.4,3311.03
  lines w0.1: 4587.64,3650.79 4483.64,3754.79 ccw(c4469.5,3740.65) 4469.5,3760.65 4258.78,3760.65 4225.5,3793.93 4225.5,4026.65 ccw(c4205.5,4026.65) 4219.64,4040.79 4176.64,4083.79 ccw(c4162.5,4069.65) 4162.5,4089.65 3801.5,4089.65 ccw(c3801.5,4069.65) 3781.5,4069.65 ccw(c3801.5,4069.65) 3801.5,4049.65 4154.21,4049.65 4185.5,4018.36 4185.5,3785.65 ccw(c4205.5,3785.65) 4191.35,3771.51 4236.35,3726.51 ccw(c4250.5,3740.65) 4250.5,3720.65 4461.21,3720.65 4553.5,3628.36 4553.5,3330.65 ccw(c4573.5,3330.65) 4573.5,3310.65 ccw(c4573.5,3330.65) 4593.5,3330.65 4593.5,3636.65 ccw(c4573.5,3636.65) 4587.64,3650.79 ; 4587.64,3650.79 4587.64,3650.79
  lines w10: 3244.5,3044.65 3244.5,4461.97 5350.79,4461.97 5350.79,3044.65 3244.5,3044.65

## Other copper
Top Layer:
  drawing of 139 lines, arcs and shapes, not listed
Bottom Layer:
  region net JL-SWDIO: 3338.78,3868.08 3331.71,3875.16 3333.99,3878.76 3335.65,3882.68 3336.67,3886.82 3337.02,3891.07 3354.69,3873.39 3350.45,3873.05 3346.31,3872.03 3342.39,3870.36 3338.78,3868.08
  region net JL-SWCLK: 3341.68,3970.98 3334.61,3978.05 3336.37,3979.97 3337.71,3981.79 3338.69,3983.53 3339.33,3985.2 3339.7,3986.84 3339.81,3988.46 3339.73,3990.09 3339.49,3991.75 3338.71,3995.24 3337.82,3999.11 3337.16,4003.54 3337.02,4006.03 3337.07,4008.71 3372.34,3973.44 3369.65,3973.39 3367.17,3973.53 3362.74,3974.19 3358.87,3975.08 3355.38,3975.86 3353.72,3976.1 3352.09,3976.18 3350.47,3976.07 3348.83,3975.71 3347.15,3975.06 3345.42,3974.09 3343.6,3972.74
  region net $C5_2: 4401.14,3407.65 4367.97,3447.65 4371.45,3447.84 4374.91,3448.39 4378.33,3449.27 4381.7,3450.47 4385,3451.96 4388.23,3453.72 4391.36,3455.72 4394.39,3457.93 4397.31,3460.33 4400.1,3462.91 4402.74,3465.63 4405.24,3468.47 4407.56,3471.4 4409.71,3474.41 4411.67,3477.47 4413.43,3480.55 4446.6,3389.58 4442.63,3391.28 4439.16,3392.95 4436.1,3394.6 4433.38,3396.22 4424.52,3402 4422.44,3403.22 4420.26,3404.31 4417.92,3405.28 4415.33,3406.09 4412.44,3406.75 4409.15,3407.24 4405.41,3407.54
  region net $C5_2: 4101.03,3447.65 4067.85,3407.65 4063.58,3407.54 4059.84,3407.24 4056.55,3406.75 4053.66,3406.09 4051.07,3405.28 4048.73,3404.31 4046.55,3403.22 4044.47,3402 4035.61,3396.22 4032.89,3394.6 4029.84,3392.95 4026.36,3391.28 4022.39,3389.58 4055.56,3480.55 4057.32,3477.47 4059.28,3474.41 4061.43,3471.4 4063.76,3468.47 4066.25,3465.63 4068.9,3462.91 4071.68,3460.33 4074.6,3457.93 4077.63,3455.72 4080.76,3453.72 4083.99,3451.96 4087.29,3450.47 4090.66,3449.27 4094.08,3448.39 4097.54,3447.84
  region net CAN_H: 5280.15,4190.6 5273.08,4197.67 5274.72,4199.45 5275.97,4201.14 5276.89,4202.76 5277.5,4204.33 5277.85,4205.87 5277.98,4207.39 5277.93,4208.92 5277.73,4210.48 5276.27,4217.38 5275.68,4221.52 5275.56,4223.83 5275.61,4226.32 5308.81,4193.12 5306.31,4193.07 5304.01,4193.19 5299.87,4193.78 5292.97,4195.24 5291.41,4195.44 5289.88,4195.5 5288.35,4195.37 5286.82,4195.02 5285.25,4194.4 5283.63,4193.49 5281.94,4192.23
  region net LED1: 3411.63,3444.59 3404.56,3437.52 3403.7,3438.24 3402.73,3438.87 3400.52,3439.81 3398.14,3440.4 3395.83,3440.67 3408.48,3453.31 3408.74,3451 3409.33,3448.63 3410.28,3446.42 3410.9,3445.44
  region net JL-SWDIO: 3860.1,3272.95 3860.1,3282.95 3861.22,3283.04 3862.35,3283.29 3864.58,3284.18 3866.67,3285.44 3868.5,3286.89 3868.5,3269 3866.67,3270.45 3864.58,3271.71 3862.35,3272.61 3861.22,3272.86
  region net JL-SWCLK: 3612.1,3298.22 3612.1,3308.22 3613.22,3308.31 3614.35,3308.56 3616.58,3309.45 3618.67,3310.72 3620.5,3312.17 3620.5,3294.28 3618.67,3295.73 3616.58,3296.99 3614.35,3297.88 3613.22,3298.13
  region net LED1: 3659.1,3345.65 3659.1,3355.65 3660.22,3355.74 3661.35,3355.99 3663.58,3356.88 3665.67,3358.14 3667.5,3359.59 3667.5,3341.7 3665.67,3343.15 3663.58,3344.41 3661.35,3345.31 3660.22,3345.56
  region net +3V3: 3651.24,3763.76 3665.38,3777.9 3667.32,3776.09 3669.24,3774.48 3672.83,3771.87 3675.59,3770.08 3676.98,3769.13 3660.01,3752.16 3659.06,3753.56 3657.27,3756.32 3654.66,3759.9 3653.05,3761.83
  region net +3V3: 3365.9,3839.65 3365.9,3819.65 3363.25,3819.56 3360.75,3819.33 3356.37,3818.65 3353.16,3817.96 3351.5,3817.65 3351.5,3841.65 3353.16,3841.33 3356.37,3840.65 3360.75,3839.96 3363.25,3839.73
  region net +3V3A: 4545.5,3850.05 4565.5,3850.05 4565.58,3847.4 4565.81,3844.9 4566.5,3840.52 4567.18,3837.31 4567.5,3835.65 4543.5,3835.65 4543.81,3837.31 4544.5,3840.52 4545.18,3844.9 4545.41,3847.4
  region net +3V3A: 4495.75,4133.54 4481.61,4119.39 4479.68,4121.2 4477.75,4122.81 4474.16,4125.42 4471.4,4127.21 4470.01,4128.16 4486.98,4145.13 4487.93,4143.74 4489.72,4140.98 4492.33,4137.4 4493.94,4135.47
  region net CAN_L: 5101.5,4169.25 5091.5,4169.25 5091.41,4170.37 5091.16,4171.5 5090.26,4173.73 5089,4175.82 5087.55,4177.65 5105.44,4177.65 5103.99,4175.82 5102.73,4173.73 5101.83,4171.5 5101.58,4170.37
  region net RXD: 3507.5,4324.25 3497.5,4324.25 3497.41,4325.37 3497.16,4326.5 3496.26,4328.73 3495,4330.82 3493.55,4332.65 3511.44,4332.65 3509.99,4330.82 3508.73,4328.73 3507.83,4326.5 3507.58,4325.37
  region net RXD: 3988.1,3913.65 3988.1,3923.65 3989.22,3923.74 3990.35,3923.99 3992.58,3924.88 3994.67,3926.14 3996.5,3927.59 3996.5,3909.7 3994.67,3911.15 3992.58,3912.41 3990.35,3913.31 3989.22,3913.56
  region net CAN_H: 4790.5,3437.05 4800.5,3437.05 4800.58,3435.93 4800.83,3434.8 4801.73,3432.56 4802.99,3430.47 4804.44,3428.65 4786.55,3428.65 4788,3430.47 4789.26,3432.56 4790.16,3434.8 4790.41,3435.93
  region net CAN_L: 4763.5,3369.05 4773.5,3369.05 4773.58,3367.93 4773.83,3366.8 4774.73,3364.56 4775.99,3362.47 4777.44,3360.65 4759.55,3360.65 4761,3362.47 4762.26,3364.56 4763.16,3366.8 4763.41,3367.93

## Silkscreen, mask and mechanical layers (free items; w line width, h text height)
Top Silkscreen Layer:
  text "GND" at 3245.75,4290.9 h45 r270
  text "R120" at 4769.5,4193.65 h60
  text "3V3" at 3245.75,4190.9 h45 r270
  text "BOOT" at 4769.5,4093.65 h60
  text "NRST" at 3245.75,4061.27 h45 r270
  text "5V-CAN" at 4951.5,4007.65 h50 r270
  text "CLK" at 3245.75,3960.9 h45 r270
  text "DIO" at 3245.75,3860.9 h45 r270
  text "TXD" at 3377.42,3709.07 h58.98 r270
  text "RXD" at 3377.42,3472.85 h58.98 r270
  text "PWR" at 3377.42,3236.63 h58.98 r270
  text "CAN-L" at 5157.5,3146.65 h50
Bottom Silkscreen Layer:
  text "R120" at 4801.6,4194.37 h60
  text "BOOT" at 4791.05,4094.37 h60
  text "DSD TECH" at 3520,3892.65 h80
  text "CAN-5V" at 4886,3876.9 h60
  text "SH-C31G" at 3550,3819.98 h80
  text "V1.0-20241223" at 3385.75,3747.31 h80
  text "CAN-GND" at 4845,3680.05 h60
  text "Base on Canable 2.0" at 3190,3674.65 h80
  text "CAN-H" at 4929.4,3483.2 h60
  text "CAN-L" at 4931.05,3286.35 h60
Mechanical Layer:
  lines w0.1: 4587.64,3650.79 4483.64,3754.79 ccw(c4469.5,3740.65) 4469.5,3760.65 4258.78,3760.65 4225.5,3793.93 4225.5,4026.65 ccw(c4205.5,4026.65) 4219.64,4040.79 4176.64,4083.79 ccw(c4162.5,4069.65) 4162.5,4089.65 3801.5,4089.65 ccw(c3801.5,4069.65) 3781.5,4069.65 ccw(c3801.5,4069.65) 3801.5,4049.65 4154.21,4049.65 4185.5,4018.36 4185.5,3785.65 ccw(c4205.5,3785.65) 4191.35,3771.51 4236.35,3726.51 ccw(c4250.5,3740.65) 4250.5,3720.65 4461.21,3720.65 4553.5,3628.36 4553.5,3330.65 ccw(c4573.5,3330.65) 4573.5,3310.65 ccw(c4573.5,3330.65) 4593.5,3330.65 4593.5,3636.65 ccw(c4573.5,3636.65) 4587.64,3650.79 ; 4587.64,3650.79 4587.64,3650.79